# Altium PCB servo_receiver.PcbDoc
Units mm, origin at the board's own origin, x right, y up, seen from the top; angles counter-clockwise.
Board outline 27.23 x 20.24 mm, 2 copper layers (Top Layer, Bottom Layer); 18 components, 10 nets, 45 pads, 0 vias.
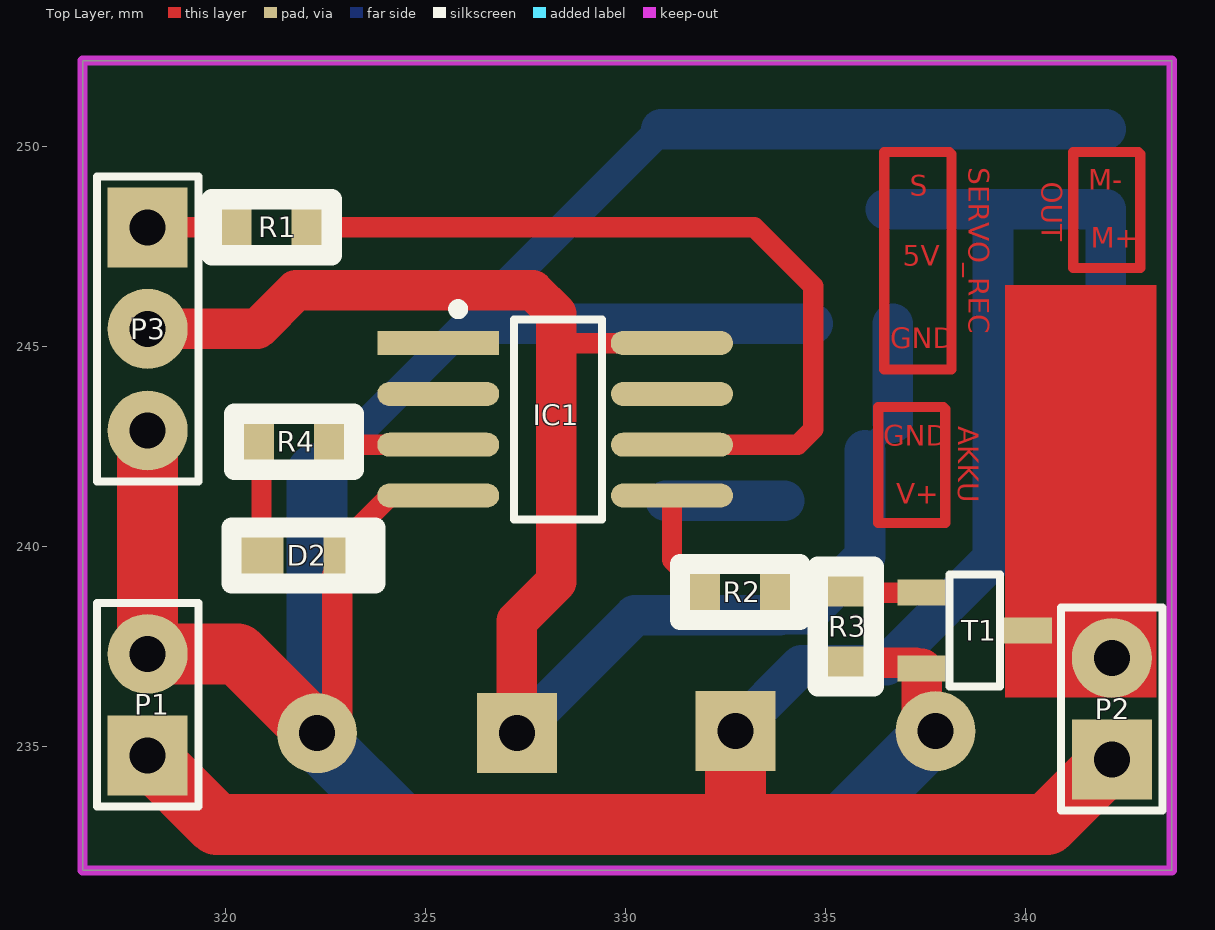
[diagram p0: Top Layer view]
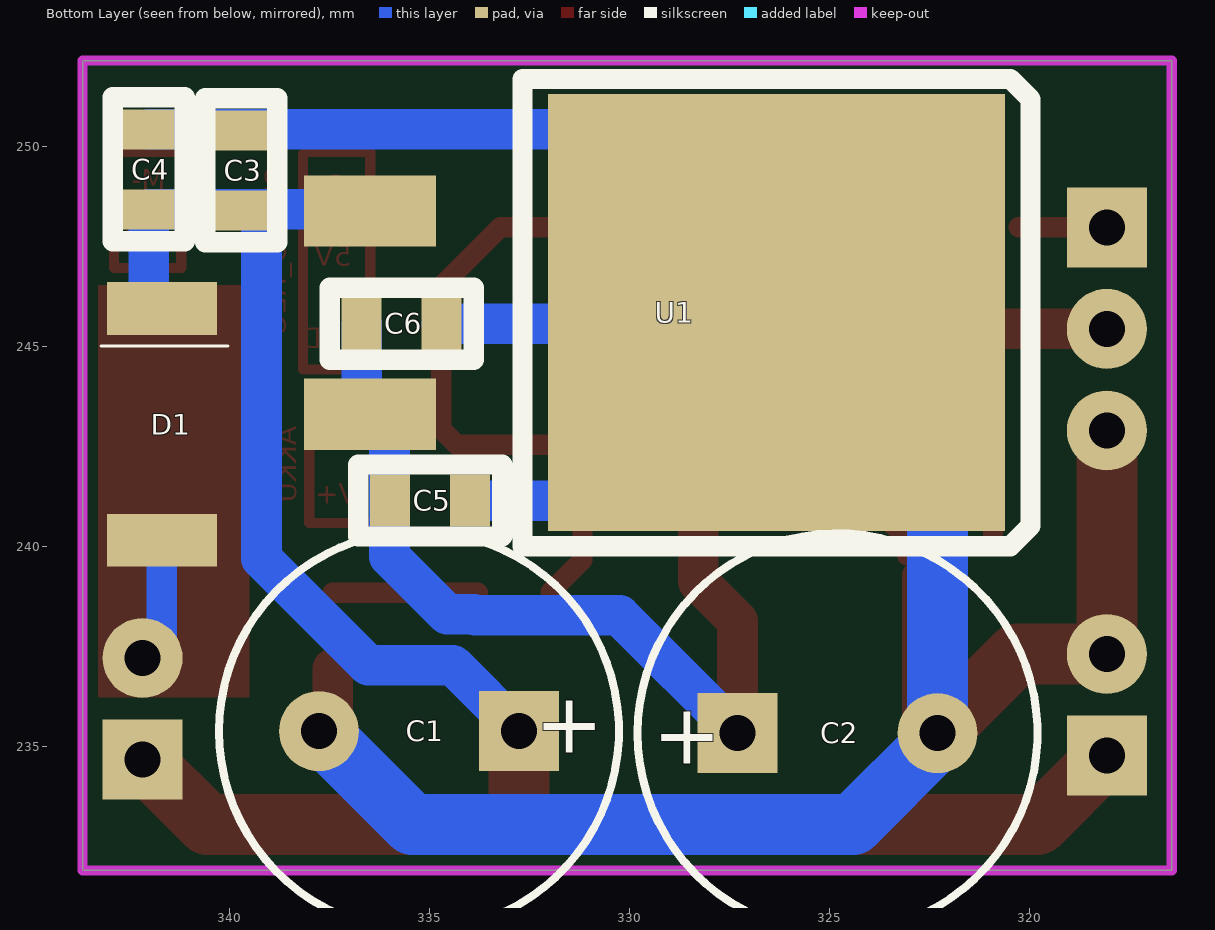
[diagram p1: Bottom Layer view, seen from below]
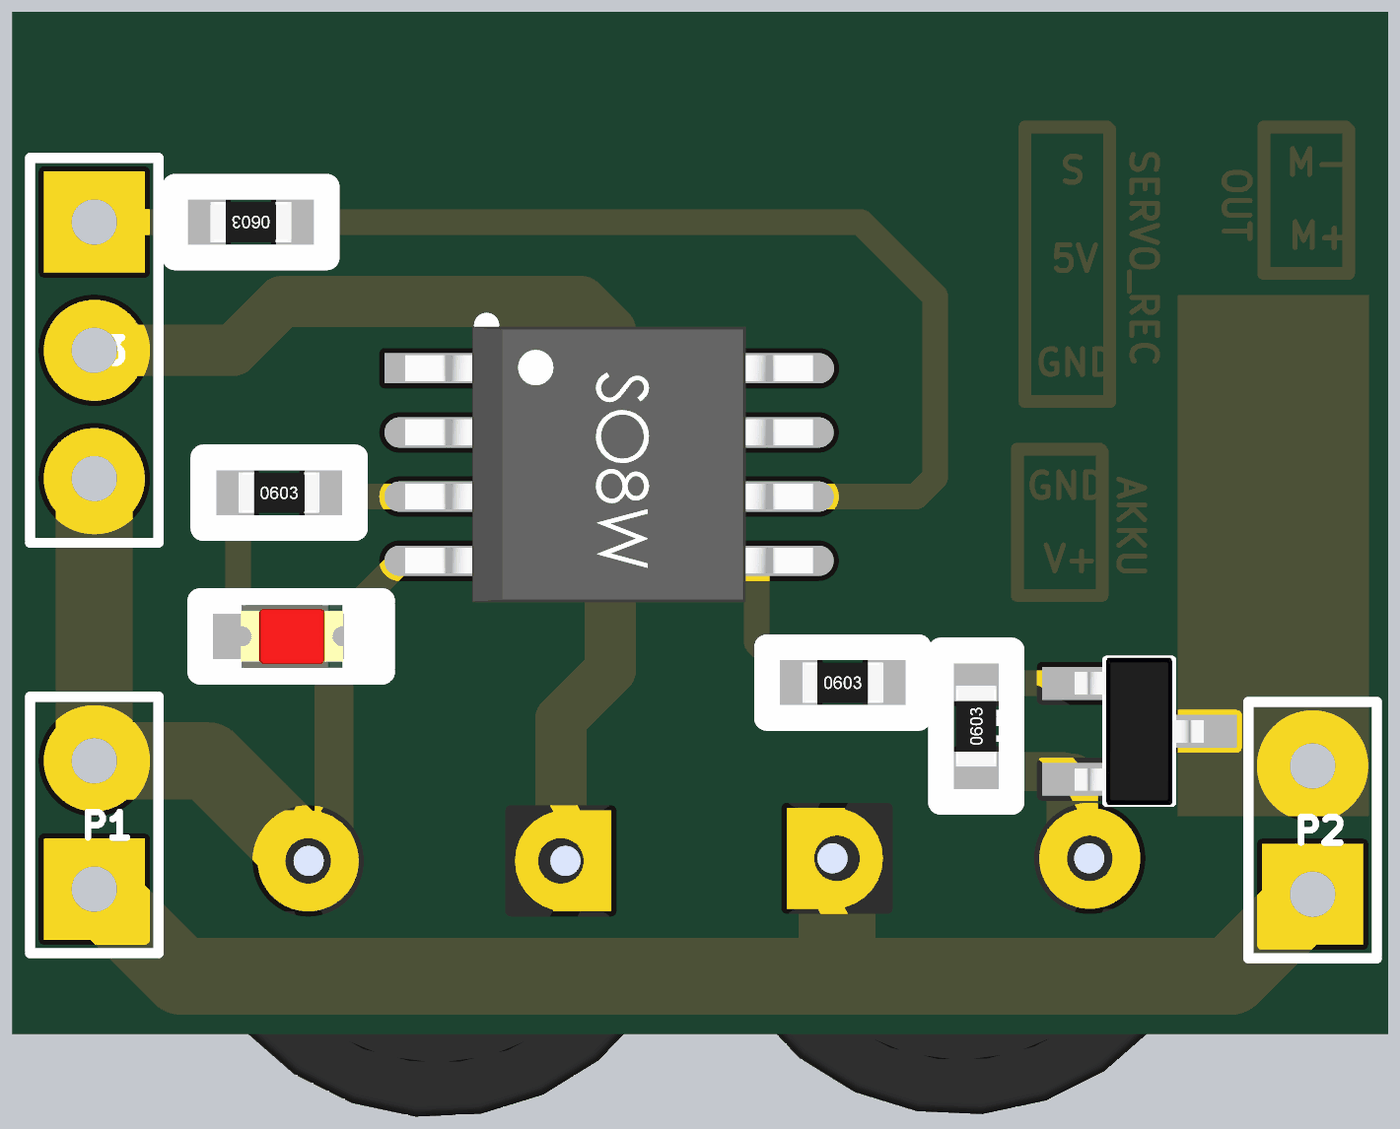
[diagram p2: 3D render of the assembled board from above, using the file's embedded part models]
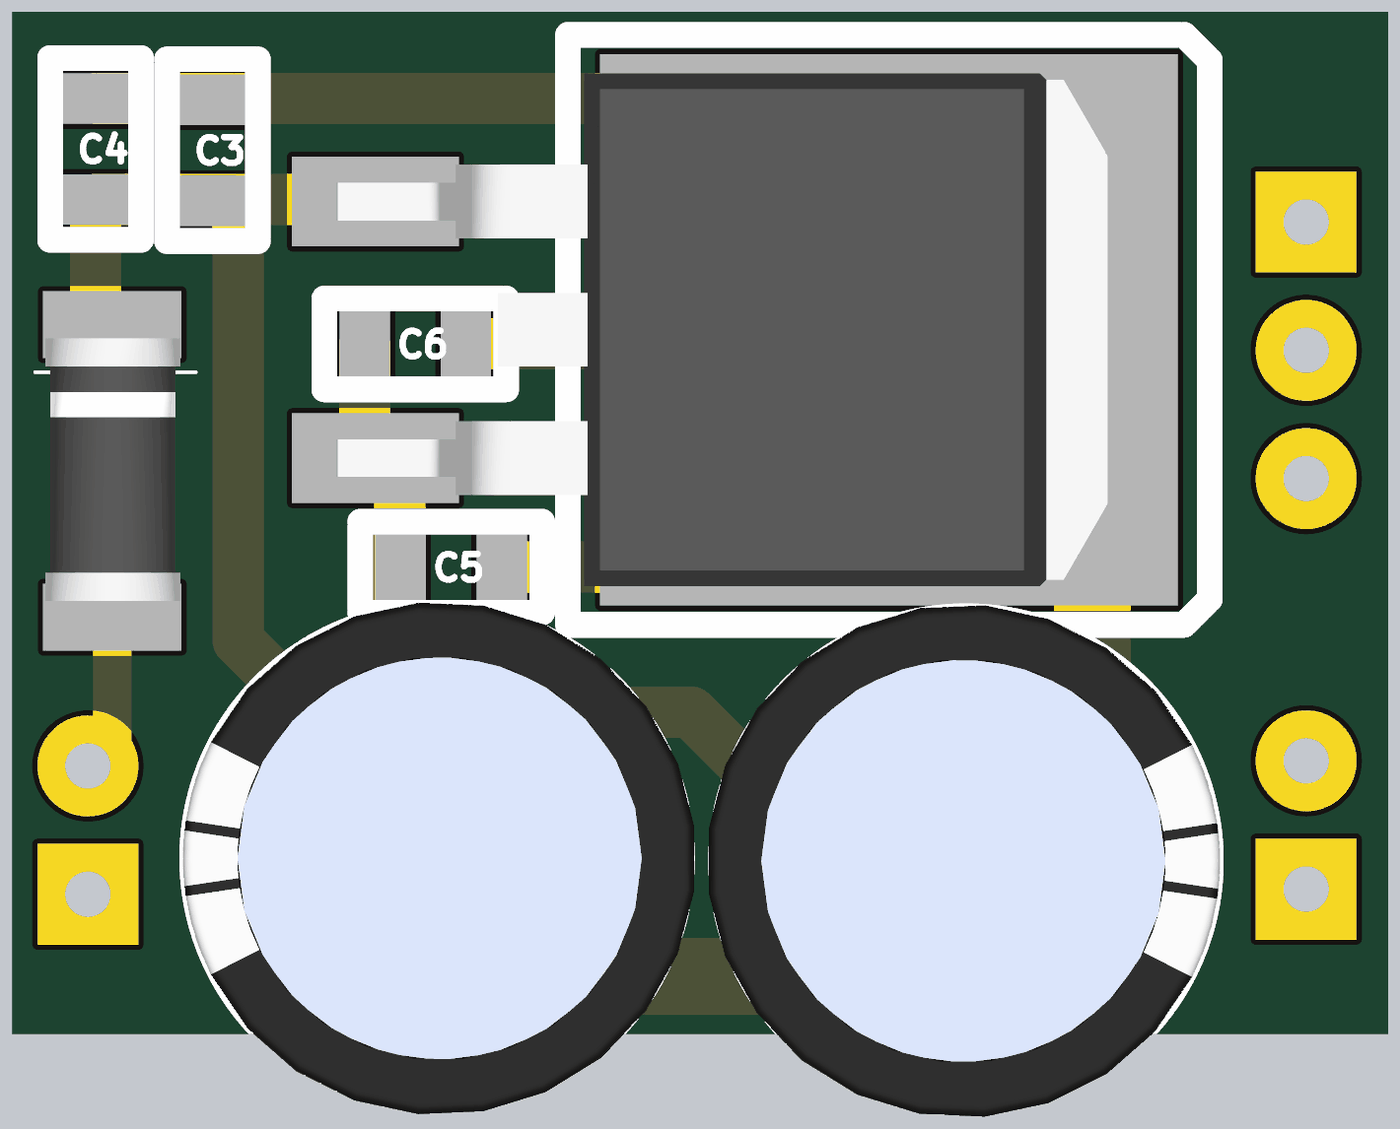
[diagram p3: 3D render of the assembled board from below, using the file's embedded part models]

## Layer stack, top to bottom
Top Layer: signal copper 0.0356
Dielectric: dielectric 0.32, FR-4, Dk 4.8
Bottom Layer: signal copper 0.0356

## Board outline
316.433,231.902 343.662,231.902 343.662,252.146 316.433,252.146

## Design rules (kind name [scope] priority, off if disabled: settings)
Clearance [All] p1: gap=0.254
ComponentClearance [All] p1 off: gap=0.254 collisioncheckmode=3 verticalgap=0.254 showdistances=FALSE
PolygonConnect [All] p1: connectstyle=Relief reliefconductorwidth=0.254 reliefentries=4 polygonreliefangle="90 Angle"
RoutingVias [All] p1: holewidth=0.711 width=1.27 viastyle="Through Hole" minholewidth=0.711 minwidth=1.27 maxholewidth=0.711 maxwidth=1.27
SilkToSilkClearance [All] p1 off: silktosilkclearance=0.254
SilkscreenOverComponentPads [All] p1 off: minsilkscreentomaskgap=0.254
SolderMaskExpansion [All] p1: expansion=0.102
Width [All] p1: maxlimit=1.524 minlimit=0.254 preferedwidth=0.254
25 further rules are at their usual default settings.

## Components (designator, comment, footprint, x,y, rotation, side; value= is the part's Value field where it differs from the comment)
C1 "470uF 35V" cap_10x12 335.204,235.382 r90 bottom
C2 "470uF 35V" cap_10x12 324.841,235.331 r270 bottom
C3 "100nF" FP_0805_CAP_085 339.7,249.403 r270 bottom
C4 "100nF" FP_0805_CAP_085 342.011,249.428 r270 bottom
C5 "100nF" FP_0805_CAP_085 334.975,241.148 r180 bottom
C6 "100nF" FP_0805_CAP_085 335.686,245.567 r0 bottom
D1 "DIODE_big" DO-213AB_R 341.681,242.595 r180 bottom
D2 "LED" FP_0805_LED_RED 320.954,239.776 r0 top
IC1 "ATtiny13" WSON_n_SOIC8 328.244,243.18 r0 top
P1 "INPUT" HDR1X2 318.059,234.772 r90 top
P2 "MOTOR" HDR1X2 342.163,234.671 r90 top
P3 "RC_REC" HDR1X3 318.059,247.98 r270 top
R1 "1K" FP_0603_RES 321.158,247.98 r180 top
R2 "1K" FP_0603_RES 332.867,238.862 r0 top
R3 "1K" FP_0603_RES 335.509,237.998 r90 top
R4 "1K" FP_0603_RES 321.716,242.621 r0 top
T1 "NMOS" FET_SOT23 338.734,237.896 r180 top
U1 "78xx" SUPPLY_D2-PAK_2 336.474,245.847 r270 bottom

## Footprints (in the part's own frame and the unit in brackets; to place one, negate y for a bottom-side part, rotate by r counter-clockwise, add the part's x,y. Pads: shape width x height; smd on the part's side, far side on the other; paste and mask are expansions set on the pad)
cap_10x12 [mm] "height: any, dia:10 RM5.0"
  round 2 hole 0.9: N(0,2.551)
  rect 2x2 hole 0.9: P(0,-2.449)
  silkscreen extent -5,-4.95 5,5.05, body extent -5.06,-5.04 5.06,5.08, height 12.7
DO-213AB_R [mil] "DIODE melf"
  rect 108x52 smd: A(0,-96) K(0,132)
  silkscreen extent -60,95 65,95, body extent -52,-83 53,121, height 104
FET_SOT23 [mm] "SOT23-3 tok"
  rect 1.2x0.65 smd: D(-1.327,0) G(1.327,-0.95) S(1.327,0.95)
  silkscreen extent -0.64,-1.4 0.64,1.4, body extent -1.27,-1.46 1.27,1.46, height 0.97
FP_0603_RES [mm] "0603 ellenállás"
  rect 0.8x0.95 smd: 1(-0.9,0) 2(0.9,0)
  silkscreen extent -1.5,-0.7 1.5,0.7, body extent -0.8,-0.4 0.8,0.4, height 0.44
FP_0805_CAP_085 [mm] "0805 kapacitás YAGEO 0.85mm magas"
  rect 1x1.3 smd: 1(-1,0) 2(1,0)
  silkscreen extent -1.8,-0.9 1.8,0.9, body extent -1,-0.64 1.03,0.64, height 0.85
FP_0805_LED_RED [mm] "0805 méretû piros LED"
  rect 1.2x1.3 smd: A(-0.1,0) K(2.1,0)
  silkscreen extent -0.8,-0.7 2.8,0.7, body extent 0.01,-0.63 2.03,0.62, height 1.1
HDR1X2 [mm] "Connector; Header; 2 Position"
  rect 2x2 hole 0.9: 1(0,0)
  round 2 hole 0.9: 2(2.54,0)
  silkscreen extent -1.27,-1.27 3.81,1.27
HDR1X3 [mm] "Connector; Header; 3 Position"
  rect 2x2 hole 0.9: 1(0,0)
  round 2 hole 0.9: 2(2.54,0) 3(5.08,0)
  silkscreen extent -1.27,-1.27 6.35,1.27
SUPPLY_D2-PAK_2 [mil] "D2PAK (TO-263) 2Lead"
  rect 70x130 smd: 1(-100,0) 3(100,0)
  rect 430x450 smd: 2(0,400)
  silkscreen extent -230,150 230,650, body extent -200,-31 200,570, height 194
WSON_n_SOIC8 [mil]
  rect 120x23.62 smd: 1(-115,75)
  oval 120x23.62 smd: 2(-115,25) 3(-115,-25) 4(-115,-75) 5(115,-75) 6(115,-25) 7(115,25)
  oval 120.42x23.62 smd: 8(115,75)
  silkscreen extent -100,-98 46,113, body extent -159,-107 159,107, height 86

## Part data
C1 C2: library part CAP_ELECT, "Polarized Capacitor"
C3 C4 C5 C6: library part CAP, "Capacitor"
D2: "Typical LED"
P1 P2: library part "Header 2", "Header, 2-Pin"
P3: library part "Header 3", "Header, 3-Pin"
R1 R2 R3 R4: library part RES, "Resistor"

## Nets (pads, with @x,y where several pads share a name; then routed paths per layer and width w, separated by ;. In a path a pad name is that pad's centre, name@x,y a point inside that pad or via, vN(x,y) a via of type N, cw(c..) or ccw(c..) an arc to the next point about the centre after c; other vN are vias at no path point)
5V: C2.P C5.1 C6.2 IC1.8 P3.2 U1.3 | length 41.6
  Top Layer w0.508: 328.27,245.085 IC1.8
  Top Layer w1.016: P3.2 320.802,245.44 321.767,246.405 327.685,246.405 328.27,245.821 328.27,245.085 328.27,239.116 327.29,238.136 C2.P
  Bottom Layer w0.508: 335.991,242.399 336.686,243.094 U1.3
  Bottom Layer w1.016: C2.P 330.236,238.277 333.854,238.277 333.88,238.303 334.543,238.303 335.991,239.751 335.991,242.399 ; U1.3@336.686,243.094 C6.2
GND: C1.N C2.N C3.1 C4.1 C5.2 C6.1 D2.K IC1.4 P1.2 P3.3 R3.1 T1.S U1.2 | length 79.2
  Top Layer w0.508: D2.K 323.054,240.2 324.129,241.275 IC1.4
  Top Layer w0.762: C2.N 322.8,235.842 D2.K@322.8,239.268 ; R3.1 T1.S@337.256,237.098
  Top Layer w1.016: C1.N@337.407,235.729 T1.S
  Top Layer w1.524: P3.3 P1.2 320.309,237.312 C2.N
  Bottom Layer w0.762: U1.2@322.29,241.823 U1.2 U1.2@330.895,250.428
  Bottom Layer w1.016: U1.2@326.593,245.567 C6.1 ; U1.2@330.895,250.428 C4.1 ; U1.2@331.013,241.148 C5.2
  Bottom Layer w1.524: U1.2@322.29,241.823 C2.N 322.29,235.164 324.409,233.045 335.418,233.045 C1.N
NetD2_1: D2.A R4.1 | length 2.6
  Top Layer w0.508: D2.A@320.904,240.054 R4.1@320.904,242.621
NetIC1_3: IC1.3 R4.2 | length 2.7
  Top Layer w0.508: R4.2@322.616,242.545 IC1.3
NetIC1_5: IC1.5 R2.1 | length 2.7
  Top Layer w0.508: IC1.5 331.165,239.663 R2.1
NetIC1_6: IC1.6 R1.1 | length 20.5
  Top Layer w0.508: R1.1 333.223,247.98 334.696,246.507 334.696,242.926 334.315,242.545 IC1.6
NetR2_2: R2.2 R3.2 T1.G | length 3.6
  Top Layer w0.508: R2.2@333.782,238.846 T1.G
SERVO_SIGNAL: P3.1 R1.2 | length 2.2
  Top Layer w0.508: P3.1 R1.2
VEZ: D1.A P2.2 T1.D | length 5.2
  Top Layer w1.016: T1.D@340.309,237.693 340.792,237.211 P2.2
  Bottom Layer w0.508: P2.2@341.681,237.693 P2.2
  Bottom Layer w0.762: P2.2@341.681,237.693 D1.A
VIN: C1.P C3.2 C4.2 D1.K P1.1 P2.1 U1.1 | length 55.4
  Top Layer w1.524: P1.1 319.786,233.045 340.538,233.045 P2.1 ; 332.755,233.553 C1.P
  Bottom Layer w0.508: U1.1@336.515,248.428 336.49,248.403 C3.2 339.192,247.895
  Bottom Layer w1.016: C1.P 334.406,237.033 336.525,237.033 339.192,239.7 339.192,247.895 ; U1.1@336.515,248.428 C4.2 D1.K@342.011,246.278
pads on no net: IC1.1 IC1.2 IC1.7
copper on no net: | length 32.4
  Top Layer w0.254: 336.321,240.589 336.321,243.484 337.947,243.484 337.998,243.434 337.998,240.589 336.321,240.589 ; 336.474,244.424 338.15,244.424 338.15,249.809 338.099,249.86 336.474,249.86 336.474,244.424 ; 341.198,246.964 341.198,249.86 342.824,249.86 342.875,249.809 342.875,246.964 341.198,246.964

## Keep-outs
Keep-Out Layer:
  the board outline again, w0.254

## Other copper
Top Layer:
  rectangle net VEZ: 339.496,236.22 343.281,246.532
  text "SERVO_REC" at 338.582,249.479 h0.51 r270
  text "OUT" at 340.411,249.123 h0.51 r270
  text "M-" at 341.579,248.92 h0.51
  text "S" at 337.109,248.768 h0.51
  text "M+" at 341.63,247.472 h0.51
  text "5V" at 336.931,247.015 h0.51
  text "GND" at 336.626,244.958 h0.51
  text "AKKU" at 338.328,243.002 h0.51 r270
  text "GND" at 336.448,242.519 h0.51
  text "V+" at 336.779,241.071 h0.51

## Text inside footprints (layer, text, board x,y; h text height)
C1: Bottom Overlay "+" at 330.632,236.144 h1.5 r180
C2: Bottom Overlay "+" at 329.413,234.569 h1.5